# EAGLE board MAX4239_breakout (EAGLE 8.5.1)
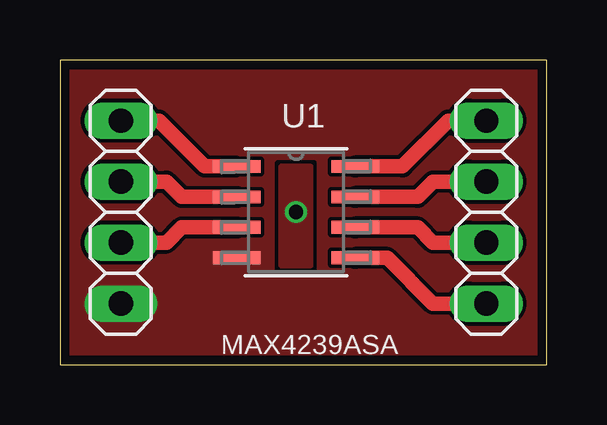
[diagram p0: board, top side]
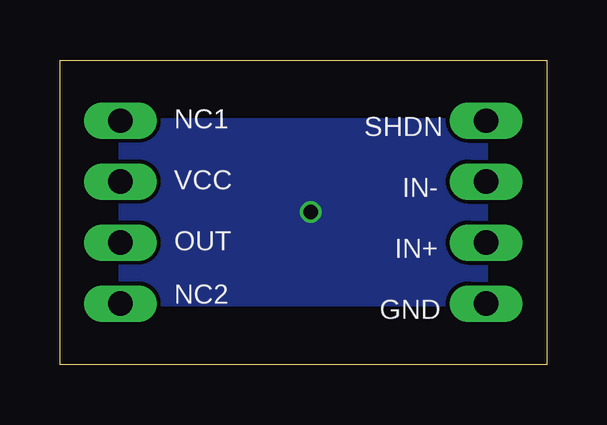
[diagram p1: board, bottom side, seen from below]

Size 20.31 x 12.69 mm. Coordinates in mm from the lower left corner, seen from the top.
Outline: 0,0 20.31,0 20.31,12.69 0,12.69 0,0
Copper layers (1*16): Top 0.035559375mm / dielectric 1.6mm / Bottom 0.035559375mm
Design rules "oshpark-2layer": minimum track width 6mil, minimum drill 10mil, track to track 6mil, track to pad 6mil, pad to pad 6mil, via to via 6mil, smd to smd 6mil, copper to edge 15mil, drill to drill 6mil, minimum pad ring 5mil, minimum via ring 5mil, stop-mask expansion 2.5mil, vias tented up to drill 0mil, thermal gap 10mil

## Footprints (pad centres in the part's own frame; a part is rotated, then mirrored left to right if it is on the bottom)
1X04 = drill 1.016 long: 1 -3.81,0; 2 -1.27,0; 3 1.27,0; 4 3.81,0
21-0041B_8 = smd 1.981 x 0.533: 1 -2.464,1.905; 2 -2.464,0.635; 3 -2.464,-0.635; 4 -2.464,-1.905; 5 2.464,-1.905; 6 2.464,-0.635; 7 2.464,0.635; 8 2.464,1.905

## Placement (x,y rotation side)
JP1  [1X04]  2.54,6.35 90 top
JP2  [1X04]  17.78,6.35 270 top
U1  MAX4239ASA  [21-0041B_8]  9.84,6.35 0 top

## Library data of the parts
JP1 JP2 = pinhead
U1 = MAX4239ASA; AVAILABILITY: Warning; DESCRIPTION: Linear IC - Op-amp Maxim Integrated MAX4239ASA+ Multi-purpose SOIC 8 N; MF: Maxim Integrated; MP: MAX4239ASA+; PACKAGE: SOIC-8 Maxim Integrated; PRICE: 2.22 USD

## Nets
GND: JP1.1 U1.4
IN+: JP1.2 U1.3
IN-: JP1.3 U1.2
NC1: JP2.1 U1.8
NC2: JP2.4 U1.5
OUT: JP2.3 U1.6
SHDN: JP1.4 U1.1
VCC: JP2.2 U1.7

## Tracks (layer width: path | path; a pad name or v marks a point on that pad's centre or on a via)
GND
  pour Top (rank 2, no thermals): 0,12.7 20.32,12.7 20.32,0 0,0
IN+
  Top 0.61: JP1.2 4.45,5.08 5.08,5.71 U1.3
IN-
  Top 0.61: U1.2 5.08,6.99 4.45,7.62 JP1.3
MCU_HEAT  (via drill 0.6)
  other vias: 9.84,6.35
  pour Bottom: 2.54,10.16 17.78,10.16 17.78,2.54 2.54,2.54
  pour Top (no thermals): 9.21,4.13 10.48,4.13 10.48,8.26 9.21,8.26
NC1
  Top 0.152: U1.8 13.02,8.26
  Top 0.61: JP2.1 16.19,10.16 14.29,8.26 U1.8
NC2
  Top 0.61: JP2.4 15.56,2.54 13.65,4.45 U1.5
OUT
  Top 0.61: JP2.3 15.56,5.08 14.92,5.71 U1.6
SHDN
  Top 0.152: 7.3,8.26 U1.1
  Top 0.61: JP1.4 4.13,10.16 6.03,8.26 7.3,8.26
VCC
  Top 0.61: JP2.2 15.56,7.62 14.92,6.99 U1.7

## Text on the board
bPlace: SHDN | NC1 | IN- | VCC | OUT | IN+ | NC2 | GND